# Altium PCB PCB.PcbDoc
Units mm, origin at the board's own origin, x right, y up, seen from the top; angles counter-clockwise.
Board outline 286.77 x 138.94 mm, 2 copper layers (Top Layer, Bottom Layer), stack 1.569 mm thick; 68 components, 68 nets, 155 pads, 38 vias.
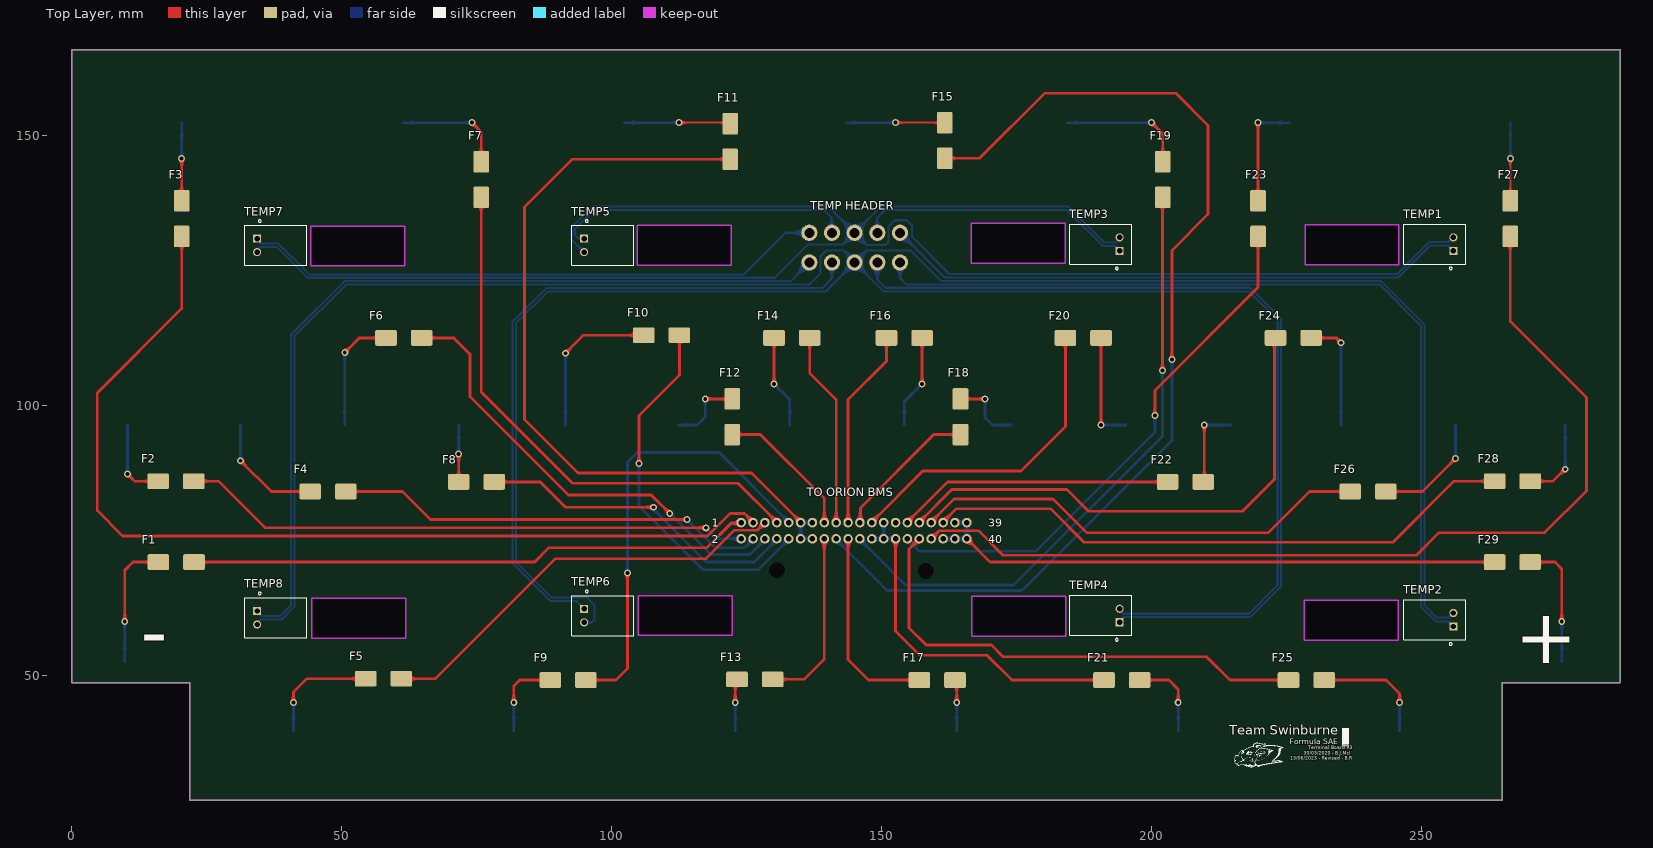
[diagram p0: Top Layer view]
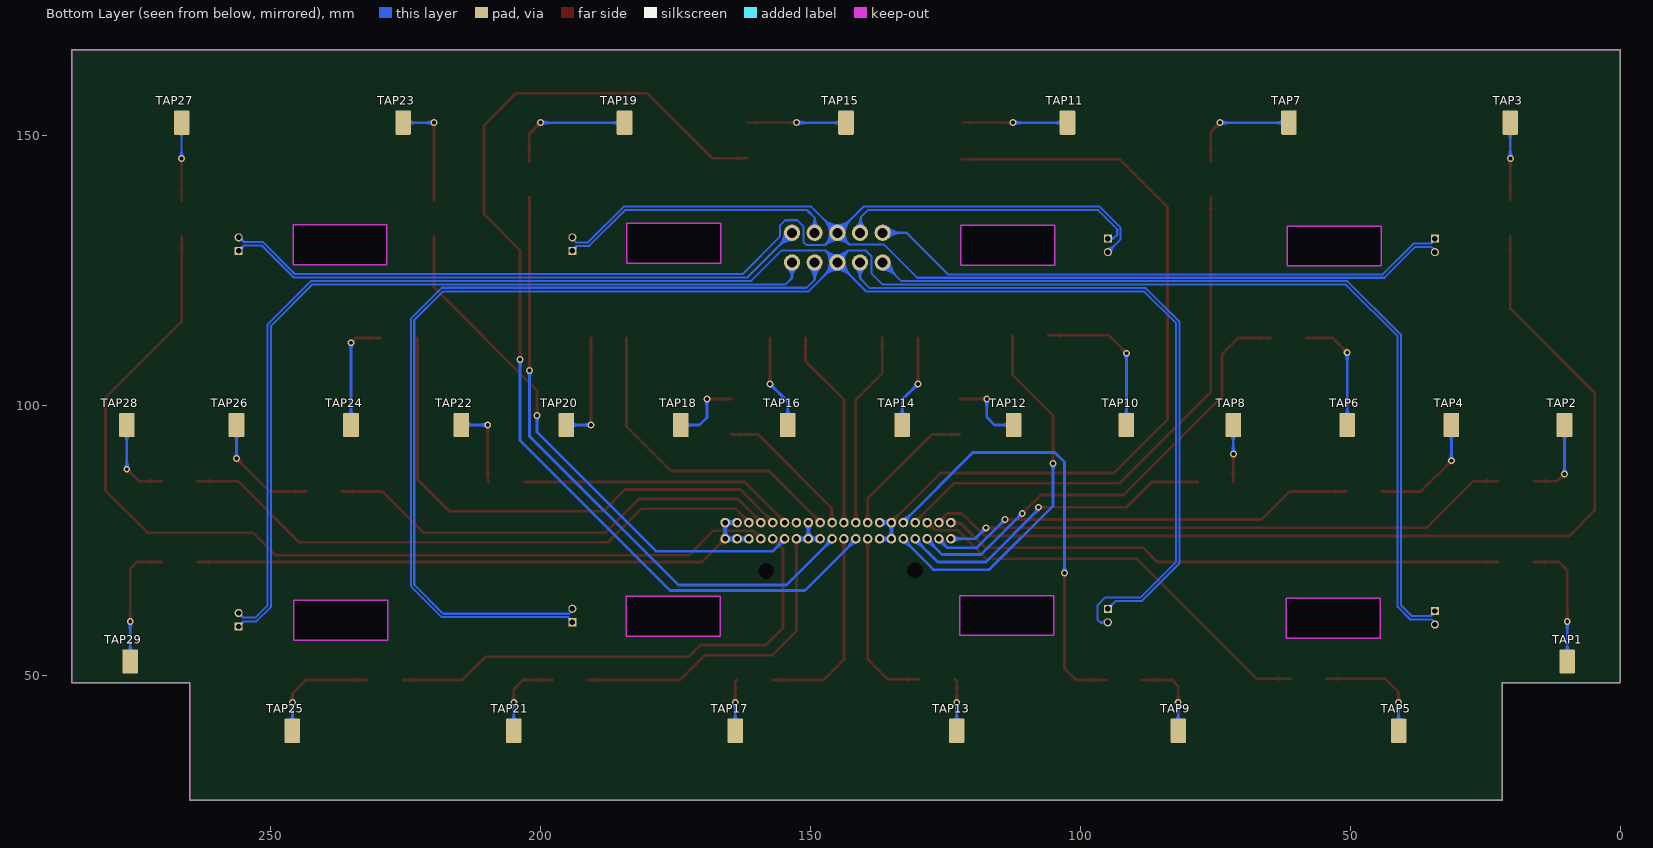
[diagram p1: Bottom Layer view, seen from below]
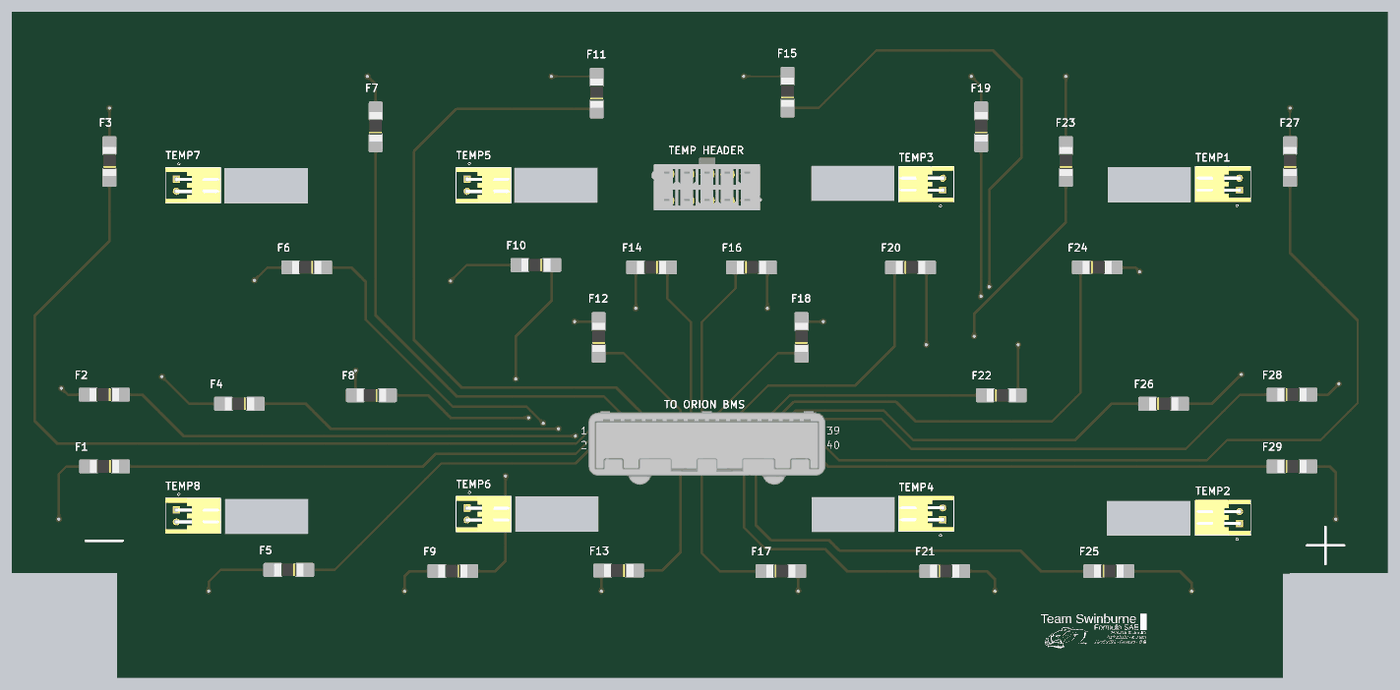
[diagram p2: 3D render of the assembled board from above, using the file's embedded part models]

## Layer stack, top to bottom
Top Solder: solder mask 0.0254, SM-001, Dk 4
Top Layer: signal copper 0.035
Dielectric 1: core 1.4986, Core-043, Dk 4.3
Bottom Layer: signal copper 0.035
Bottom Solder: solder mask 0.0254, SM-001, Dk 4

## Board outline
0,48.641 21.844,48.641 21.844,26.924 264.922,26.924 264.922,48.641 286.766,48.641 286.766,165.862 0,165.862
cut-out: 228.282,63.881 245.681,63.881 245.681,56.515 228.282,56.515
cut-out: 166.688,64.643 184.087,64.643 184.087,57.277 166.688,57.277
cut-out: 228.409,133.477 245.808,133.477 245.808,126.111 228.409,126.111
cut-out: 166.56,133.731 183.959,133.731 183.959,126.365 166.56,126.365
cut-out: 44.386,64.262 61.785,64.262 61.785,56.896 44.386,56.896
cut-out: 104.902,64.77 122.301,64.77 122.301,57.404 104.902,57.404
cut-out: 104.712,133.35 122.111,133.35 122.111,125.984 104.712,125.984
cut-out: 44.259,133.223 61.658,133.223 61.658,125.857 44.259,125.857

## Design rules (kind name [scope] priority, off if disabled: settings)
Clearance [All] p1: gap=0.254 ignorepadtopadclearanceinfootprint=FALSE except(0: Arc-Hole Track-Hole SMDPad-Hole THPad-Hole Via-Hole Fill-Hole Poly-Hole Region-Hole Text-Hole)
PolygonConnect [All] p1: connectstyle=Relief reliefconductorwidth=0.254 reliefentries=4 polygonreliefangle="90 Angle" airgapwidth=0.254
RoutingVias [All] p1: holewidth=0.711 width=1.27 viastyle="Through Hole" minholewidth=0.711 minwidth=1.27 maxholewidth=0.711 maxwidth=1.27
SolderMaskExpansion [All] p1: expansion=0.102 istentingtop=FALSE
Width [All] p1: maxlimit=1.27 minlimit=0.254 preferedwidth=1.016
30 further rules are at their usual default settings.

## Components (designator, comment, footprint, x,y, rotation, side; value= is the part's Value field where it differs from the comment)
F1 "" 0451Series_LTF 19.304,70.993 r180 top
F2 "" 0451Series_LTF 19.248,85.979 r180 top
F3 "" 0451Series_LTF 20.32,134.62 r90 top
F4 "" 0451Series_LTF 47.427,84.074 r180 top
F5 "" 0451Series_LTF 57.714,49.403 r180 top
F6 "" 0451Series_LTF 61.468,112.522 r180 top
F7 "" 0451Series_LTF 75.819,141.859 r90 top
F8 "" 0451Series_LTF 74.93,85.852 r180 top
F9 "" 0451Series_LTF 91.902,49.149 r180 top
F10 "" 0451Series_LTF 109.22,113.03 r180 top
F11 "" 0451Series_LTF 121.92,148.9 r90 top
F12 "" 0451Series_LTF 122.301,97.917 r90 top
F13 "" 0451Series_LTF 126.492,49.276 r180 top
F14 "" 0451Series_LTF 133.35,112.522 r180 top
F15 "" 0451Series_LTF 161.671,149.098 r90 top
F16 "" 0451Series_LTF 154.178,112.522 r0 top
F17 "" 0451Series_LTF 160.279,49.149 r0 top
F18 "" 0451Series_LTF 164.592,97.917 r90 top
F19 "" 0451Series_LTF 202.057,141.859 r90 top
F20 "" 0451Series_LTF 187.325,112.522 r0 top
F21 "" 0451Series_LTF 194.468,49.149 r0 top
F22 "" 0451Series_LTF 206.248,85.852 r0 top
F23 "" 0451Series_LTF 219.71,134.62 r90 top
F24 "" 0451Series_LTF 226.243,112.522 r0 top
F25 "" 0451Series_LTF 228.656,49.149 r0 top
F26 "" 0451Series_LTF 240.086,84.074 r0 top
F27 "" 0451Series_LTF 266.446,134.62 r90 top
F28 "" 0451Series_LTF 266.827,85.979 r0 top
F29 "" 0451Series_LTF 266.827,70.993 r0 top
TAP1 "" S7051-42R 9.779,52.578 r180 bottom
TAP2 "" S7051-42R 10.287,96.393 r180 bottom
TAP3 "" S7051-42R 20.32,152.4 r180 bottom
TAP4 "" S7051-42R 31.242,96.393 r180 bottom
TAP5 "" S7051-42R 41.021,39.751 r180 bottom
TAP6 "" S7051-42R 50.546,96.393 r180 bottom
TAP7 "" S7051-42R 61.341,152.4 r180 bottom
TAP8 "" S7051-42R 71.628,96.393 r180 bottom
TAP9 "" S7051-42R 81.852,39.751 r180 bottom
TAP10 "" S7051-42R 91.44,96.393 r180 bottom
TAP11 "" S7051-42R 102.362,152.4 r180 bottom
TAP12 "" S7051-42R 112.327,96.393 r180 bottom
TAP13 "" S7051-42R 122.872,39.751 r180 bottom
TAP14 "" S7051-42R 132.969,96.393 r180 bottom
TAP15 "" S7051-42R 143.383,152.4 r180 bottom
TAP16 "" S7051-42R 154.178,96.393 r180 bottom
TAP17 "" S7051-42R 163.893,39.751 r180 bottom
TAP18 "" S7051-42R 173.99,96.393 r180 bottom
TAP19 "" S7051-42R 184.404,152.4 r180 bottom
TAP20 "" S7051-42R 195.199,96.393 r180 bottom
TAP21 "" S7051-42R 204.915,39.751 r180 bottom
TAP22 "" S7051-42R 214.63,96.393 r180 bottom
TAP23 "" S7051-42R 225.425,152.4 r180 bottom
TAP24 "" S7051-42R 235.077,96.393 r180 bottom
TAP25 "" S7051-42R 245.935,39.751 r180 bottom
TAP26 "" S7051-42R 256.286,96.393 r180 bottom
TAP27 "" S7051-42R 266.446,152.4 r180 bottom
TAP28 "" S7051-42R 276.606,96.393 r180 bottom
TAP29 "" S7051-42R 275.971,52.578 r180 bottom
TEMP1 "" S2B-XH-A(LF)(SN) 256.032,129.901 r90 top
TEMP2 "" S2B-XH-A(LF)(SN) 256.032,60.32 r90 top
TEMP3 "" S2B-XH-A(LF)(SN) 194.183,129.901 r90 top
TEMP4 "" S2B-XH-A(LF)(SN) 194.183,61.107 r90 top
TEMP5 "" S2B-XH-A(LF)(SN) 94.742,129.667 r270 top
TEMP6 "" S2B-XH-A(LF)(SN) 94.742,61.067 r270 top
TEMP7 "" S2B-XH-A(LF)(SN) 34.163,129.667 r270 top
TEMP8 "" S2B-XH-A(LF)(SN) 34.163,60.686 r270 top
"TEMP HEADER" "" 39288100 153.383,126.5 r0 top
"TO ORION BMS" "" 1376113-6 145.964,75.311 r0 top

## Footprints (in the part's own frame and the unit in brackets; to place one, negate y for a bottom-side part, rotate by r counter-clockwise, add the part's x,y. Pads: shape width x height; smd on the part's side, far side on the other; paste and mask are expansions set on the pad)
0451Series_LTF [mm]
  rrect20% 4x2.921 smd paste+0 mask+0: 1(3.3,0) 2(-3.3,0)
  body extent -3.05,-1.35 3.05,1.35, height 2.69
1376113-6 [mil]
  round 0 hole 114.49 unplated: 0(-605,-230) 0(480,-235)
  round 70 hole 40: 1(-866.14,118.11) 2(-866.14,0) 3(-779.53,118.11) 4(-779.53,0) 5(-692.91,118.11) 6(-692.91,0) 7(-606.3,118.11) 8(-606.3,0) 9(-519.69,118.11) 10(-519.69,0) 11(-433.07,118.11) 12(-433.07,0) 13(-346.46,118.11) 14(-346.46,0) 15(-259.84,118.11) 16(-259.84,0) 17(-173.23,118.11) 18(-173.23,0) 19(-86.61,118.11) 20(-86.61,0) 21(0,118.11) 22(0,0) 23(86.61,118.11) 24(86.61,0) 25(173.23,118.11) 26(173.23,0) 27(259.84,118.11) 28(259.84,0) 29(346.46,118.11) 30(346.46,0) 31(433.07,118.11) 32(433.07,0) 33(519.69,118.11) 34(519.69,0) 35(606.3,118.11) 36(606.3,0) 37(692.91,118.11) 38(692.91,0) 39(779.53,118.11) 40(779.53,0)
  body extent -1015,-321 930,281, height 940
39288100 [mm]
  round 3 hole 1.85: 1(0,0) 2(-4.2,0) 3(-8.4,0) 4(-12.6,0) 5(-16.8,0) 6(0,5.5) 7(-4.2,5.5) 8(-8.4,5.5) 9(-12.6,5.5) 10(-16.8,5.5)
  body extent -20,-2.05 3,8.95, height 2.99
S2B-XH-A(LF)(SN) [mm]
  rect 1.508x1.508 hole 1: 1(-1.25,0.127)
  round 1.508 hole 1: 2(1.25,0.127)
  silkscreen extent -4.75,-2.17 3.7,9.33, body extent -3.68,-2.19 3.72,9.31, height 6.15
S7051-42R [mm] "6mm Gold Spring Contact"
  rrect15% 2.9x4.5 smd: 1(0,0)

## Part data
F1 F2 F3 F4 F5 F6 F7 F8 F9 F10 F11 F12 F13 F14 F15 F16 F17 F18 F19 F20 F21 F22 F23 F24 F25 F26 F27 F28 F29: library part 0154.750MRL, "FUSE BOARD MNT 750MA 125VAC/VDC", Digikey Part Number=F2576CT-ND, Manufacturer="Littelfuse Inc.", Digikey Link=https://www.digikey.com.au/en/products/detail/littelfuse-inc/0451-750MRL/700816, Part Number=0154.750MRL
TAP1 TAP2 TAP3 TAP4 TAP5 TAP6 TAP7 TAP8 TAP9 TAP10 TAP11 TAP12 TAP13 TAP14 TAP15 TAP16 TAP17 TAP18 TAP19 TAP20 TAP21 TAP22 TAP23 TAP24 TAP25 TAP26 TAP27 TAP28 TAP29: library part S7051-42R, Digikey Part Number=952-1741-1-ND, Angle=90, Contact=Gold, Digikey Link=https://www.digikey.com.au/en/products/detail/harwin-inc/S7051-42R/3131057, Flange=NA, Part Number=S7051-42R, Pitch=NA, Positions=1, Row Spacing=NA
TEMP1 TEMP2 TEMP3 TEMP4 TEMP5 TEMP6 TEMP7 TEMP8: library part S2B-XH-A(LF)(SN), Digikey Part Number=455-2257-ND, Angle=0, Contact=NA, Digikey Link=https://www.digikey.com.au/en/products/detail/jst-sales-america-inc/S2B-XH-A-LF-SN/1651055, Flange=No, Part Number=S2B-XH-A(LF)(SN), Pitch=2.54mm, Positions=2, Row Spacing=2.54mm
"TEMP HEADER": library part 39288100, Digikey Part Number=WM23804-ND, Angle=0, Contact=Tin, Flange=No, Part Number=39288100, Pitch=4.2mm, Positions=10, Row Spacing=5.5mm
"TO ORION BMS": library part 1376113-6, Digikey Part Number=1376113-6-ND, Angle=180, Contact=Gold, Digikey Link=https://www.digikey.com.au/products/en?keywords=1376113-6, Flange=na, Part Number=1376113-6, Pitch=3, Positions=40, Row Spacing=2.2

## Via types
v1: diameter 1.27, hole 0.711, Top Layer to Bottom Layer, tented both sides, 38 vias

## Nets (pads, with @x,y where several pads share a name; then routed paths per layer and width w, separated by ;. In a path a pad name is that pad's centre, name@x,y a point inside that pad or via, vN(x,y) a via of type N, cw(c..) or ccw(c..) an arc to the next point about the centre after c; other vN are vias at no path point)
1: "TO ORION BMS.1" F1.2 | length 104.5
  Top Layer w0.508: F1.2 85.725,70.993 88.392,73.66 117.602,73.66 122.126,78.184 123.552,78.184 123.695,78.042 123.964,78.311
2: "TO ORION BMS.2" F2.2 | length 105.8
  Top Layer w0.508: F2.2 27.178,85.979 35.814,77.343 v1(117.475,77.343)
  Bottom Layer w0.508: v1(117.475,77.343) 119.507,75.311 123.964,75.311
3: "TO ORION BMS.3" F3.2 | length 183.2
  Top Layer w0.508: F3.2 20.32,117.983 4.699,102.362 4.699,80.518 9.398,75.819 117.729,75.819 121.92,80.01 124.6,80.01 126.164,78.446 126.164,78.311
4: "TO ORION BMS.4" F4.2 | length 80.5
  Top Layer w0.508: F4.2 61.214,84.074 66.421,78.867 v1(113.919,78.867)
  Bottom Layer w0.508: v1(113.919,78.867) 119.126,73.66 124.648,73.66 126.164,75.176 126.164,75.311
5: "TO ORION BMS.5" F5.2 | length 79.3
  Top Layer w0.508: F5.2 67.31,49.403 89.535,71.628 117.475,71.628 122.761,76.914 126.967,76.914 128.364,78.311
6: "TO ORION BMS.6" F6.2 | length 86.1
  Top Layer w0.508: F6.2 70.728,112.522 73.75,109.5 73.75,101.637 91.948,83.439 107.315,83.439 v1(110.744,80.01)
  Bottom Layer w0.508: v1(110.744,80.01) 118.364,72.39 125.578,72.39 128.364,75.176 128.364,75.311
7: "TO ORION BMS.7" F7.2 | length 100.9
  Top Layer w0.508: F7.2 75.819,102.489 92.71,85.598 123.412,85.598 130.564,78.446 130.564,78.311
8: "TO ORION BMS.8" F8.2 | length 60.7
  Top Layer w0.508: F8.2 86.741,85.852 91.44,81.153 v1(107.696,81.153)
  Bottom Layer w0.508: v1(107.696,81.153) 107.505,80.962 117.475,70.993 126.381,70.993 130.564,75.176 130.564,75.311
9: "TO ORION BMS.9" F9.2 | length 82.9
  Top Layer w0.508: F9.2 100.749,49.149 102.9,51.3 v1(102.9,69)
  Bottom Layer w0.508: v1(102.9,69) 102.9,89.5 104.713,91.313 119.897,91.313 132.764,78.446 132.764,78.311
10: "TO ORION BMS.10" F10.2 | length 69.8
  Top Layer w0.508: v1(105.029,89.281) 105.029,98.171 112.52,105.662 F10.2
  Bottom Layer w0.508: v1(105.029,89.281) 105.029,81.407 116.84,69.596 127.184,69.596 132.764,75.176 132.764,75.311
11: "TO ORION BMS.11" "TO ORION BMS.12" "TO ORION BMS.13" "TO ORION BMS.14" F11.2 | length 147.7
  Top Layer w0.508: F11.2 92.641,145.6 83.82,136.779 83.82,97.409 93.726,87.503 125.907,87.503 134.964,78.446 134.964,78.311
  Bottom Layer w0.508: 137.164,75.311 134.964,75.311 134.964,78.311 137.164,78.311
12: "TO ORION BMS.15" F12.2 | length 26.4
  Top Layer w0.508: F12.2 127.506,94.617 139.364,82.759 139.364,78.311
13: "TO ORION BMS.16" F13.2 | length 33.4
  Top Layer w0.508: F13.2 135.576,49.276 139.364,53.064 139.364,75.311
14: "TO ORION BMS.17" F14.2 | length 36.2
  Top Layer w0.508: F14.2 136.65,106.047 141.564,101.133 141.564,78.311
15: "TO ORION BMS.18" F15.2 | length 195.1
  Top Layer w0.508: F15.2 168.15,145.798 180.213,157.861 204.47,157.861 210.439,151.892 210.439,135.439 203.75,128.75 v1(203.75,108.5)
  Bottom Layer w0.508: 141.564,75.311 141.564,75.176 150.99,65.75 176,65.75 203.75,93.5 v1(203.75,108.5)
16: "TO ORION BMS.19" F16.2 | length 37.2
  Top Layer w0.508: 143.764,78.311 143.764,101.092 150.878,108.206 F16.2
17: "TO ORION BMS.20" F17.2 | length 37.2
  Top Layer w0.508: 143.764,75.311 143.764,52.936 147.551,49.149 F17.2
18: "TO ORION BMS.21" F18.2 | length 27.4
  Top Layer w0.508: 145.964,78.311 146.383,78.311 146.05,78.644 146.05,81.026 159.641,94.617 F18.2
19: "TO ORION BMS.22" F19.2 | length 115.4
  Top Layer w0.508: v1(202,106.5) 202,138.502 F19.2
  Bottom Layer w0.508: 145.964,75.311 145.964,75.176 154.39,66.75 174.446,66.75 202,94.304 v1(202,106.5)
20: "TO ORION BMS.23" F20.2 | length 59.7
  Top Layer w0.508: 148.164,78.311 148.164,78.446 157.602,87.884 175.768,87.884 184.025,96.141 F20.2
21: "TO ORION BMS.24" "TO ORION BMS.25" "TO ORION BMS.26" "TO ORION BMS.28" F21.2 | length 66.8
  Top Layer w0.508: 152.564,75.311 152.564,58.256 157.099,53.721 169.545,53.721 174.117,49.149 F21.2
  Bottom Layer w0.508: 148.164,75.311 150.364,75.311 ; 150.364,78.311 150.364,75.311 ; 152.564,75.311 150.364,75.311
22: "TO ORION BMS.29" F22.2 | length 51.4
  Top Layer w0.508: 154.764,78.311 154.764,78.446 162.17,85.852 F22.2
23: "TO ORION BMS.30" F23.2 | length 100.2
  Top Layer w0.508: v1(200.6,98.175) 200.6,102.8 219.71,121.91 F23.2
  Bottom Layer w0.508: 154.764,75.311 154.764,75.176 156.915,73.025 178.562,73.025 200.6,95.063 v1(200.6,98.175)
24: "TO ORION BMS.31" F24.2 | length 98.8
  Top Layer w0.508: 156.964,78.311 156.964,78.446 162.973,84.455 184.293,84.455 188.357,80.391 216.789,80.391 222.743,86.345 222.743,112.322 F24.2
25: "TO ORION BMS.32" F25.2 | length 91.6
  Top Layer w0.508: 156.964,75.311 155.067,73.414 155.067,58.801 158.242,55.626 170.307,55.626 172.466,53.467 210.185,53.467 214.503,49.149 F25.2
26: "TO ORION BMS.33" F26.2 | length 85.2
  Top Layer w0.508: 159.164,78.311 159.164,78.446 163.395,82.677 181.737,82.677 187.96,76.454 221.615,76.454 229.235,84.074 F26.2
27: "TO ORION BMS.34" F27.2 | length 181.8
  Top Layer w0.508: 159.164,75.311 160.664,76.811 167.918,76.811 172.466,72.263 249.047,72.263 253.238,76.454 272.796,76.454 280.543,84.201 280.543,101.473 266.446,115.57 F27.2
28: "TO ORION BMS.35" F28.2 | length 110.6
  Top Layer w0.508: 161.364,78.311 161.364,78.446 163.817,80.899 181.229,80.899 187.452,74.676 244.729,74.676 256.032,85.979 F28.2
29: "TO ORION BMS.36" "TO ORION BMS.37" "TO ORION BMS.38" "TO ORION BMS.39" "TO ORION BMS.40" F29.2 | length 109.2
  Top Layer w0.508: 165.764,75.311 170.082,70.993 F29.2
  Bottom Layer w0.508: 161.364,75.311 163.564,75.311 165.764,75.311 165.764,78.311 163.564,78.311
NetF1_1: F1.1 TAP1.1 | length 23.8
  Top Layer w0.508: v1(9.779,60) 9.779,69.479 11.293,70.993 F1.1
  Bottom Layer w0.508: TAP1.1 v1(9.779,60)
NetF2_1: F2.1 TAP2.1 | length 15.3
  Top Layer w0.508: v1(10.287,87.313) 11.621,85.979 F2.1
  Bottom Layer w0.508: v1(10.287,87.313) TAP2.1
NetF3_1: F3.1 TAP3.1 | length 14.5
  Top Layer w0.508: F3.1 v1(20.32,145.772)
  Bottom Layer w0.508: v1(20.32,145.772) TAP3.1
NetF4_1: F4.1 TAP4.1 | length 21.9
  Top Layer w0.508: v1(31.242,89.758) 36.926,84.074 F4.1
  Bottom Layer w0.508: v1(31.242,89.758) TAP4.1
NetF5_1: F5.1 TAP5.1 | length 21.6
  Top Layer w0.508: v1(41.021,45) 41.021,46.921 43.503,49.403 F5.1
  Bottom Layer w0.508: TAP5.1 v1(41.021,45)
NetF6_1: F6.1 TAP6.1 | length 22.2
  Top Layer w0.508: v1(50.546,109.846) 53.222,112.522 F6.1
  Bottom Layer w0.508: TAP6.1 v1(50.546,109.846)
NetF7_1: F7.1 TAP7.1 | length 20.7
  Top Layer w0.508: v1(74.1,152.4) 75.819,150.681 F7.1
  Bottom Layer w0.508: TAP7.1 v1(74.1,152.4)
NetF8_1: F8.1 TAP8.1 | length 10.5
  Top Layer w0.508: v1(71.628,91) 71.628,85.854 F8.1
  Bottom Layer w0.508: v1(71.628,91) TAP8.1
NetF9_1: F9.1 TAP9.1 | length 15.5
  Top Layer w0.508: v1(81.852,45) 81.852,48.051 82.949,49.149 F9.1
  Bottom Layer w0.508: TAP9.1 v1(81.852,45)
NetF10_1: F10.1 TAP10.1 | length 29.2
  Top Layer w0.508: v1(91.44,109.69) 94.78,113.03 F10.1
  Bottom Layer w0.508: TAP10.1 v1(91.44,109.69)
NetF11_1: F11.1 TAP11.1 | length 19.6
  Top Layer w0.381: v1(112.463,152.4) 121.72,152.4 F11.1
  Bottom Layer w0.508: TAP11.1 v1(112.463,152.4)
NetF12_1: F12.1 TAP12.1 | length 14.1
  Top Layer w0.508: v1@117.151,101.217 F12.1
  Bottom Layer w0.508: TAP12.1 115.868,96.393 117.301,97.826 v1(117.301,101.217)
NetF13_1: F13.1 TAP13.1 | length 9.7
  Top Layer w0.508: v1(122.872,45) 122.872,48.957 F13.1
  Bottom Layer w0.508: TAP13.1 v1(122.872,45)
NetF14_1: F14.1 TAP14.1 | length 17.3
  Top Layer w0.508: v1(130.05,104) F14.1
  Bottom Layer w0.508: v1(130.05,104) 132.969,101.081 TAP14.1
NetF15_1: F15.1 TAP15.1 | length 18.3
  Top Layer w0.381: v1(152.526,152.4) F15.1@161.669,152.4
  Bottom Layer w0.508: TAP15.1 v1(152.526,152.4)
NetF16_1: F16.1 TAP16.1 | length 17.5
  Top Layer w0.508: v1(157.478,104) F16.1
  Bottom Layer w0.508: TAP16.1 154.178,100.7 v1(157.478,104)
NetF17_1: F17.1 TAP17.1 | length 9.5
  Top Layer w0.508: F17.1 163.893,48.835 v1(163.893,45)
  Bottom Layer w0.508: TAP17.1 v1(163.893,45)
NetF18_1: F18.1 TAP18.1 | length 13.4
  Top Layer w0.508: F18.1 v1(169.152,101.217)
  Bottom Layer w0.508: v1(169.152,101.217) 169.152,97.748 170.507,96.393 TAP18.1
NetF19_1: F19.1 TAP19.1 | length 23.7
  Top Layer w0.508: v1(200,152.4) 202.057,150.343 F19.1
  Bottom Layer w0.508: TAP19.1 v1(200,152.4)
NetF20_1: F20.1 TAP20.1 | length 20.7
  Top Layer w0.508: v1(190.625,96.393) F20.1
  Bottom Layer w0.508: v1(190.625,96.393) TAP20.1
NetF21_1: F21.1 TAP21.1 | length 15.5
  Top Layer w0.508: F21.1 203.2,49.149 204.915,47.434 v1(204.915,45)
  Bottom Layer w0.508: TAP21.1 v1(204.915,45)
NetF22_1: F22.1 TAP22.1 | length 15.5
  Top Layer w0.508: F22.1 209.748,86.052 v1(209.748,96.393)
  Bottom Layer w0.508: v1(209.748,96.393) TAP22.1
NetF23_1: F23.1 TAP23.1 | length 20.2
  Top Layer w0.508: F23.1 v1(219.71,152.4)
  Bottom Layer w0.508: v1(219.71,152.4) TAP23.1
NetF24_1: F24.1 TAP24.1 | length 21.1
  Top Layer w0.508: F24.1 234.178,112.522 v1(235.077,111.623)
  Bottom Layer w0.508: TAP24.1 v1(235.077,111.623)
NetF25_1: F25.1 TAP25.1 | length 21.9
  Top Layer w0.508: F25.1 243.451,49.149 245.935,46.665 v1(245.935,45)
  Bottom Layer w0.508: TAP25.1 v1(245.935,45)
NetF26_1: F26.1 TAP26.1 | length 21.6
  Top Layer w0.508: F26.1 250.174,84.074 v1(256.286,90.186)
  Bottom Layer w0.508: v1(256.286,90.186) TAP26.1
NetF27_1: F27.1 TAP27.1 | length 14.5
  Top Layer w0.381: F27.1 v1(266.446,145.772)
  Bottom Layer w0.381: v1(266.446,145.772) TAP27.1
NetF28_1: F28.1 TAP28.1 | length 15.6
  Top Layer w0.508: F28.1 274.379,85.979 v1(276.606,88.206)
  Bottom Layer w0.508: v1(276.606,88.206) TAP28.1
NetF29_1: F29.1 TAP29.1 | length 23.5
  Top Layer w0.508: F29.1 274.707,70.993 275.971,69.729 v1(275.971,60)
  Bottom Layer w0.508: TAP29.1 v1(275.971,60)
TEMP+1: "TEMP HEADER.6" TEMP1.1 | length 108.8
  Bottom Layer w0.381: 153.383,132 161.668,123.715 245.715,123.715 251.665,129.665 254.891,129.665 TEMP1.1
TEMP+2: "TEMP HEADER.1" TEMP2.1 | length 162.6
  Bottom Layer w0.381: 153.383,126.5 153.383,123.617 154.555,122.445 242.205,122.445 249.873,114.777 249.873,62.728 250.059,62.543 252.602,60 254.975,60 TEMP2.1
TEMP+3: "TEMP HEADER.7" TEMP3.1 | length 51.5
  Bottom Layer w0.381: 149.183,132 149.183,134.783 150.615,136.215 184.285,136.215 190.917,129.584 193.269,129.584 193.492,129.36 193.492,129.215 TEMP3.1
TEMP+4: "TEMP HEADER.2" TEMP4.1 | length 163.4
  Bottom Layer w0.381: 149.183,126.5 149.183,123.317 150.69,121.81 218.288,121.81 224,116.098 224,66.5 218.289,60.789 194.843,60.789 194.62,60.566 194.62,60.421 TEMP4.1
TEMP+5: "TEMP HEADER.9" TEMP5.1 | length 55.6
  Bottom Layer w0.381: TEMP5.1 94.828,130.958 93.767,130.958 93.135,131.59 93.135,132.687 96.648,136.2 139.325,136.2 140.677,134.848 140.677,132.106 140.783,132
TEMP+6: "TEMP HEADER.4" TEMP6.1 | length 126.9
  Bottom Layer w0.381: TEMP6.1 93.361,63.825 88.55,63.825 81.6,70.775 81.6,109.95 81.6,115.498 87.852,121.75 138.95,121.75 140.783,123.583 140.783,126.5
TEMP+7: "TEMP HEADER.10" TEMP7.1 | length 108.3
  Bottom Layer w0.381: TEMP7.1 34.854,130.353 34.854,130.208 35.077,129.984 38.263,129.984 43.943,124.305 124.48,124.305 132.175,132 136.583,132
TEMP+8: "TEMP HEADER.5" TEMP8.1 | length 159.2
  Bottom Layer w0.381: TEMP8.1 34.854,61.372 34.854,61.227 35.077,61.004 38.605,61.004 40.575,62.973 40.575,113.075 50.535,123.035 133.118,123.035 136.583,126.5
TEMP-1: "TEMP HEADER.8" TEMP1.2 TEMP3.2 TEMP5.2 TEMP7.2 | length 356.7
  Bottom Layer w0.381: TEMP7.2 34.29,128.722 34.693,129.125 ; 34.693,129.126 34.916,129.35 38,129.35 43.68,123.67 130.195,123.67 136.325,129.8 142.783,129.8 144.983,132 ; TEMP5.2 92.5,130.786 92.5,132.95 96.385,136.835 140.148,136.835 144.983,132 ; 193.653,130.442 193.43,130.219 191.18,130.219 184.548,136.85 149.833,136.85 144.983,132 ; 193.653,130.443 194.056,130.846 TEMP3.2 ; TEMP1.2 255.769,131.151 254.918,130.3 251.399,130.3 245.449,124.35 162.55,124.35 155.625,131.275 155.625,133.325 154.633,134.317 152.392,134.317 151.275,133.2 151.275,130.298 150.727,129.75 147.233,129.75 144.983,132
TEMP-2: "TEMP HEADER.3" TEMP2.2 TEMP4.2 TEMP6.2 TEMP8.2 | length 641
  Bottom Layer w0.381: TEMP8.2 34.29,59.741 34.693,60.144 ; 34.693,60.145 34.916,60.369 38.868,60.369 41.21,62.71 41.21,112.812 50.798,122.4 136.6,122.4 138.675,124.475 138.675,127.7 139.675,128.7 143.05,128.7 144.983,126.767 144.983,126.5 ; TEMP6.2 96.317,59.817 96.775,60.275 96.775,63.05 95.35,64.475 88.798,64.475 82.235,71.038 82.235,115.235 88.1,121.1 139.583,121.1 144.983,126.5 ; TEMP4.2 194.056,62.052 194.459,61.649 ; 194.459,61.648 194.682,61.424 218.026,61.424 223.365,66.763 223.365,115.835 218.1,121.1 150.383,121.1 144.983,126.5 ; TEMP2.2 255.085,60.75 252.75,60.75 250.508,62.992 250.508,115.04 242.468,123.08 160.92,123.08 155.25,128.75 147.233,128.75 145.116,126.634 144.983,126.5
pads on no net: "TO ORION BMS.0" "TO ORION BMS.27"

## Keep-outs
Keep-Out Layer:
  lines w0.254: 104.902,57.404 122.301,57.404 122.301,64.77 104.902,64.77 104.902,57.531 ; 0,48.641 0,165.862 286.766,165.862 286.766,48.641 264.922,48.641 264.922,26.924 21.844,26.924 21.844,48.641 0,48.641 ; 44.259,125.857 44.259,133.223 61.658,133.223 61.658,125.857 44.259,125.857 ; 44.386,56.896 44.386,64.262 61.785,64.262 61.785,56.896 44.386,56.896 ; 104.712,125.984 104.712,133.35 122.111,133.35 122.111,125.984 104.712,125.984 ; 166.56,126.365 166.56,133.731 183.959,133.731 183.959,126.365 166.56,126.365 ; 166.688,57.277 184.087,57.277 184.087,64.643 166.688,64.643 166.688,57.277 ; 228.282,56.515 228.282,63.881 245.681,63.881 245.681,56.515 228.282,56.515 ; 228.409,126.111 228.409,133.477 245.808,133.477 245.808,126.111 228.409,126.111

## Silkscreen, mask and mechanical layers (free items; w line width, h text height)
Top Overlay:
  drawing of 20 lines, arcs and shapes, not listed
  text "1" at 118.5,77.5 h1.5
  text "39" at 169.75,77.5 h1.5
  text "2" at 118.5,74.5 h1.5
  text "40" at 169.75,74.5 h1.5
  text "-" at 12.701,53.201 h10.16
  text "+" at 267.25,52.25 h10.16
  text "Team Swinburne" at 214.411,38.318 h3.05
  text "Formula SAE" at 225.587,36.921 h1.78
  text "Terminal Board R3" at 229.003,36.032 h1.02
  text "30/03/2020 - B.J.McI" at 228.16,35.066 h1.02
  text "13/06/2023 - Revised - B.R" at 225.689,34.1 h1.02
Drill Drawing:
  circle w0.254: c9.856,192.435 r0.847
  lines w0.254: 9.009,183.968 9.009,184.392 9.433,184.815 9.009,185.238 9.009,185.662 9.433,185.662 9.856,185.238 10.279,185.662 10.703,185.662 10.703,185.238 10.279,184.815 10.703,184.392 10.703,183.968 10.279,183.968 9.856,184.392 9.433,183.968 9.009,183.968 ; 9.009,188.202 9.433,188.202 9.433,187.778 10.279,187.778 10.279,188.202 10.703,188.202 10.703,189.048 10.279,189.048 10.279,189.472 9.433,189.472 9.433,189.048 9.009,189.048 9.009,188.202 ; 9.009,195.398 10.703,195.398 10.703,197.092 9.009,197.092 9.009,195.398 ; 9.009,200.902 10.703,200.902 9.856,199.208 9.009,200.902
  lines w0.381: 7.491,182.825 279.55,182.825 ; 7.491,201.875 279.55,201.875 ; 21.483,179.015 21.483,205.685 ; 36.465,179.015 36.465,205.685 ; 65.412,179.015 65.412,205.685 ; 78.262,179.015 78.262,205.685 ; 96.9,179.015 96.9,205.685 ; 134.989,179.015 134.989,205.685 ; 149.971,179.015 149.971,205.685 ; 168.914,179.015 168.914,205.685 ; 188.975,179.015 188.975,205.685 ; 210.66,179.015 210.66,205.685 ; 244.534,179.015 244.534,205.685 ; 7.491,179.015 279.55,179.015 279.55,205.685 7.491,205.685 7.491,179.015
  text "Symbol" at 9.777,203.018 h1.83
  text "Count" at 22.626,203.018 h1.83
  text "Hole Size" at 37.608,203.018 h1.83
  text "Plated" at 66.555,203.018 h1.83
  text "Hole Type" at 79.405,203.018 h1.83
  text "Drill Layer Pair" at 98.043,203.018 h1.83
  text "Via/Pad" at 136.132,203.018 h1.83
  text "Pad Shape" at 151.114,203.018 h1.83
  text "Template" at 170.057,203.018 h1.83
  text "Description" at 190.118,203.018 h1.83
  text "Hole Tolerance (+)" at 211.803,203.018 h1.83
  text "Hole Tolerance (-)" at 245.677,203.018 h1.83
  text "2" at 22.626,199.208 h1.52
  text "114.49mil (2.908mm)" at 37.608,199.208 h1.52
  text "NPTH" at 66.555,199.208 h1.52
  text "Round" at 79.405,199.208 h1.52
  text "Top Layer - Bottom Layer" at 98.043,199.208 h1.52
  text "Pad" at 136.132,199.208 h1.52
  text "Rounded" at 151.114,199.208 h1.52
  text "c0hn291" at 170.057,199.208 h1.52
  text "10" at 22.626,195.398 h1.52
  text "72.84mil (1.850mm)" at 37.608,195.398 h1.52
  text "PTH" at 66.555,195.398 h1.52
  text "Round" at 79.405,195.398 h1.52
  text "Top Layer - Bottom Layer" at 98.043,195.398 h1.52
  text "Pad" at 136.132,195.398 h1.52
  text "Rounded" at 151.114,195.398 h1.52
  text "c300h185" at 170.057,195.398 h1.52
  text "16" at 22.626,191.588 h1.52
  text "39.37mil (1.000mm)" at 37.608,191.588 h1.52
  text "PTH" at 66.555,191.588 h1.52
  text "Round" at 79.405,191.588 h1.52
  text "Top Layer - Bottom Layer" at 98.043,191.588 h1.52
  text "Pad" at 136.132,191.588 h1.52
  text "(Mixed)" at 151.114,191.588 h1.52
  text "(Mixed)" at 170.057,191.588 h1.52
  text "38" at 22.626,187.778 h1.52
  text "28.00mil (0.711mm)" at 37.608,187.778 h1.52
  text "PTH" at 66.555,187.778 h1.52
  text "Round" at 79.405,187.778 h1.52
  text "Top Layer - Bottom Layer" at 98.043,187.778 h1.52
  text "Via" at 136.132,187.778 h1.52
  text "Rounded" at 151.114,187.778 h1.52
  text "v127h71m0mx0" at 170.057,187.778 h1.52
  text "40" at 22.626,183.968 h1.52
  text "40.00mil (1.016mm)" at 37.608,183.968 h1.52
  text "PTH" at 66.555,183.968 h1.52
  text "Round" at 79.405,183.968 h1.52
  text "Top Layer - Bottom Layer" at 98.043,183.968 h1.52
  text "Pad" at 136.132,183.968 h1.52
  text "Rounded" at 151.114,183.968 h1.52
  text "c178h102" at 170.057,183.968 h1.52
  text "106 Total" at 22.626,180.158 h1.52
  text "FABRICATION NOTES" at 295.386,163.315 h3
  text "1. QUANTITY: 10" at 295.386,157.784 h3
  text "2. SIZE:" at 295.386,152.252 h3
  text "3. LAYERS: 2" at 295.386,146.72 h3
  text "4. SIGNAL LAYERS: 1,2" at 295.386,140.189 h3
  text "a) WEIGHT: 1oz" at 300.386,134.658 h3
  text "5. SOLDER MASKS: Red" at 295.386,129.126 h3
  text "6. SILKSCREEN: White" at 295.386,123.595 h3
  text "7. SURFACE FINISH: OSP" at 295.386,118.063 h3
  text "8. FINISHED COPPER: 2oz Cu" at 295.386,112.532 h3
  text "9. TOTAL THICKNESS: 1.6mm" at 295.386,107 h3
  text "CHECK CUTOUT ARE ROUTED CORRECTED (DEFINED ON KEEPOUT LAYER)" at 294.777,93.023 h3